# Altium PCB Lumos_v.0.2.PcbDoc
Units mm, origin at the board's own origin, x right, y up, seen from the top; angles counter-clockwise.
Board outline 50.08 x 69.72 mm, 2 copper layers (Top Layer, Bottom Layer); 32 components, 25 nets, 118 pads, 13 vias.
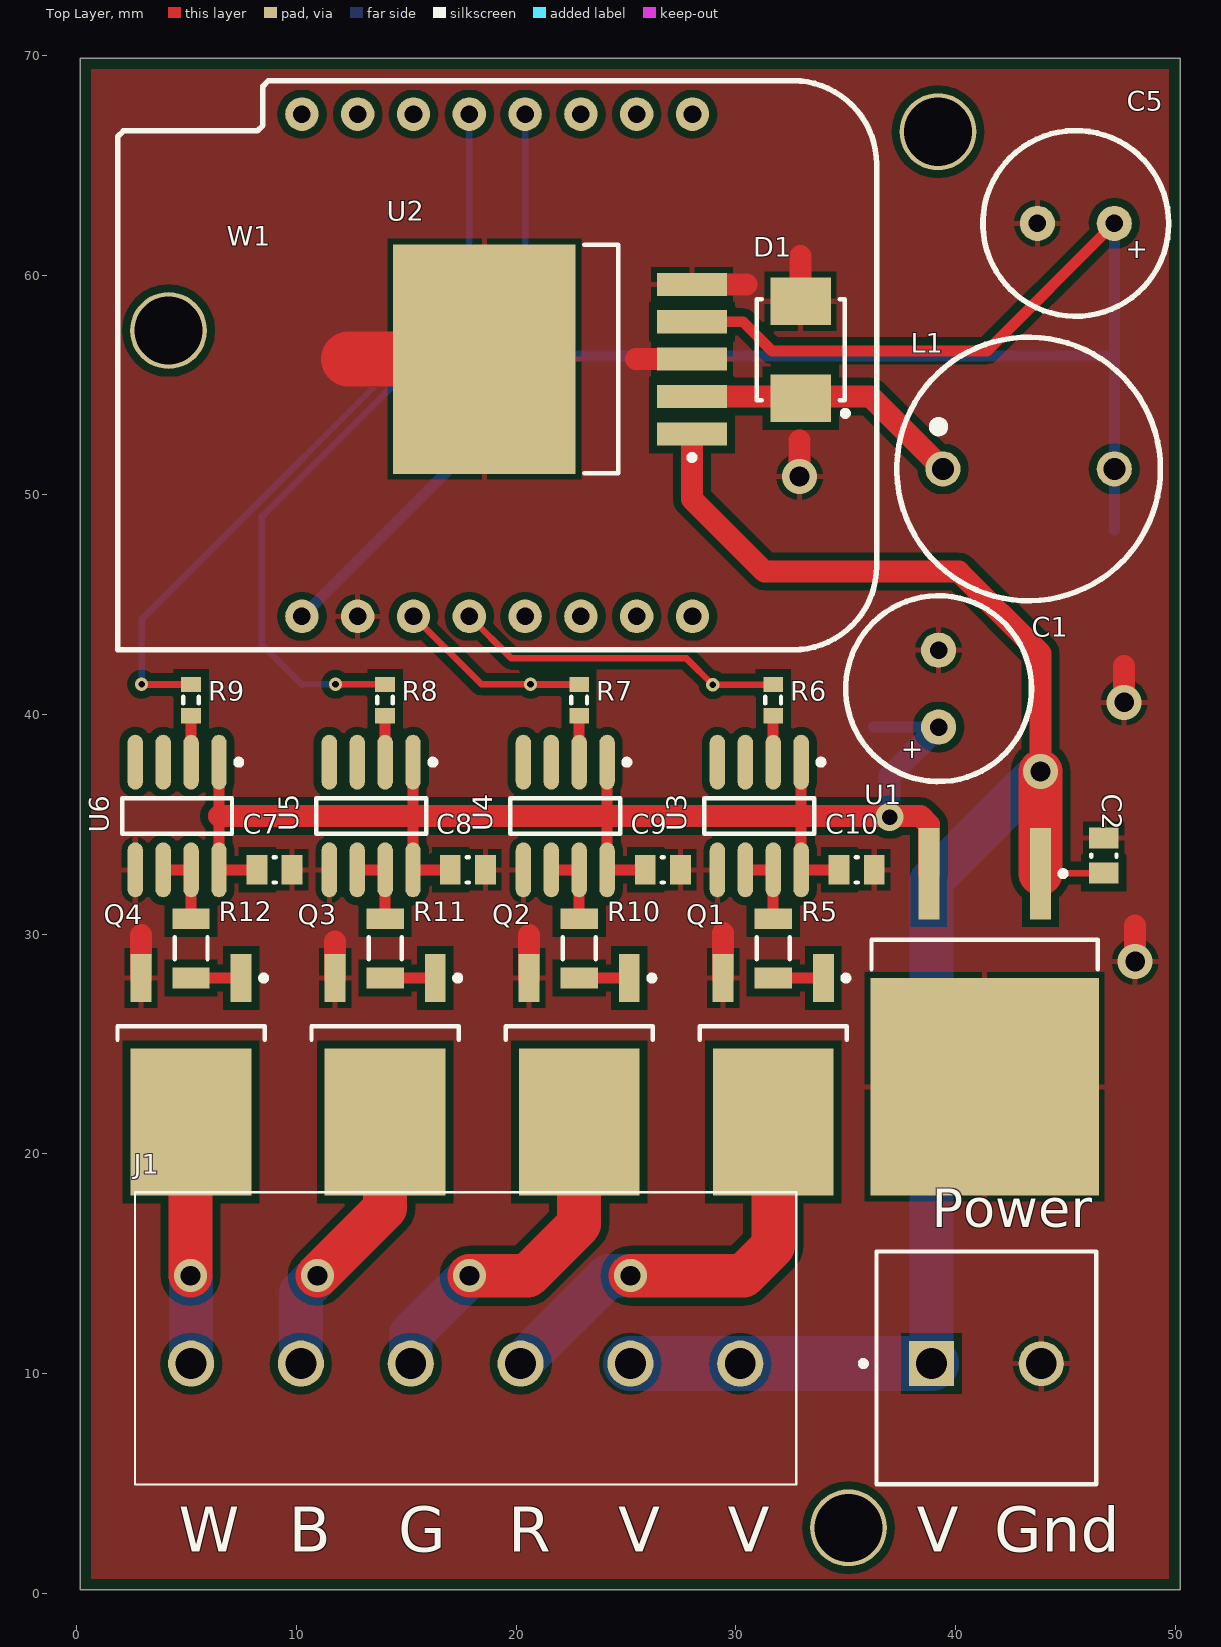
[diagram p0: Top Layer view]
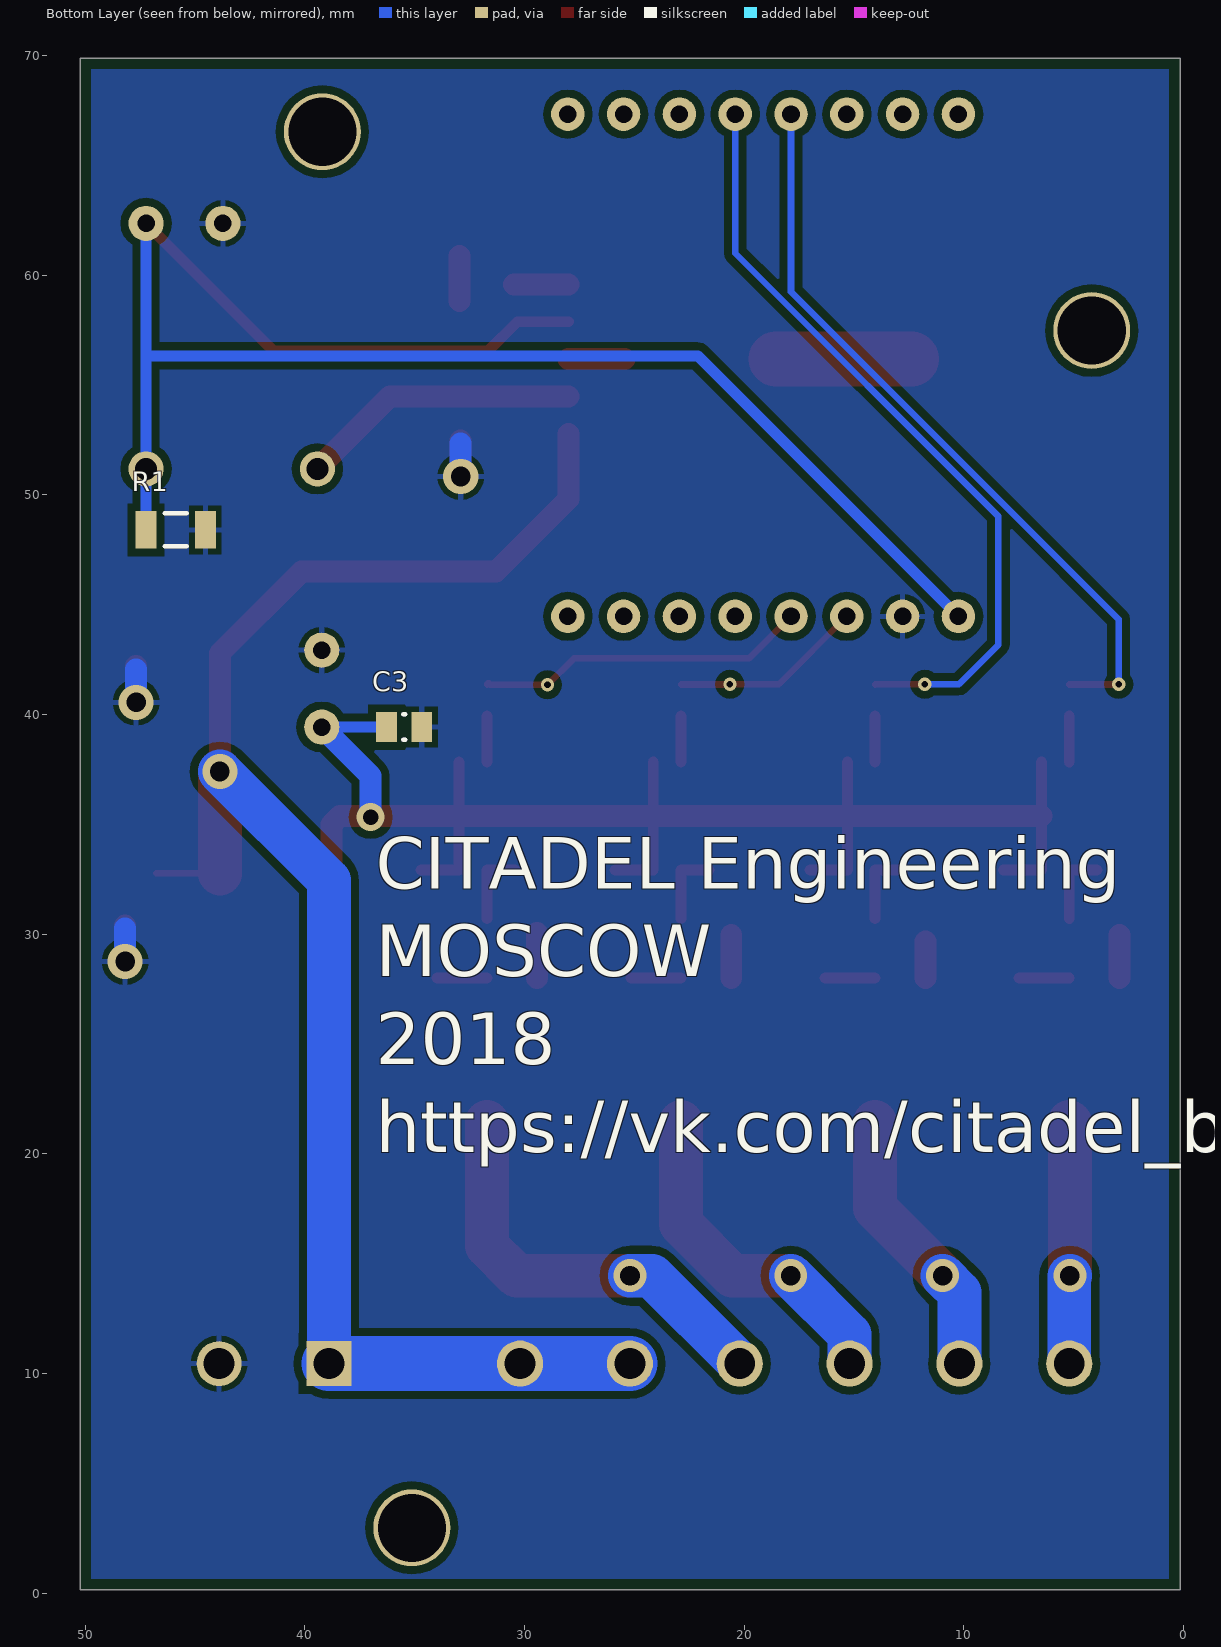
[diagram p1: Bottom Layer view, seen from below]

## Layer stack, top to bottom
Top Solder: solder mask 0.0102, Solder Resist, Dk 3.5
Top Layer: signal copper 0.0356
Dielectric 1: dielectric 0.32, FR-4, Dk 4.8
Bottom Layer: signal copper 0.0356
Bottom Solder: solder mask 0.0102, Solder Resist, Dk 3.5

## Board outline
0.15,0.15 0.15,69.875 50.225,69.875 50.225,0.15

## Design rules (kind name [scope] priority, off if disabled: settings)
BoardOutlineClearance [All] p1: gap=0.5 ignorepadtopadclearanceinfootprint=FALSE
Clearance [All] p1: gap=0.254 ignorepadtopadclearanceinfootprint=FALSE except(-0.3: Poly-Text; 0.25: Arc-SMDPad Track-SMDPad; 0.35: Arc-Poly Track-Poly SMDPad-Poly THPad-Poly Via-Poly Fill-Poly Poly-Poly)
ComponentClearance [All] p1: gap=0.254 collisioncheckmode=3 verticalgap=0 showdistances=FALSE
PolygonConnect [All] p1: connectstyle=Relief reliefconductorwidth=0.254 reliefentries=4 polygonreliefangle="90 Angle" airgapwidth=0.254
RoutingVias [All] p1: holewidth=0.6 width=1.2 viastyle="Through Hole" minholewidth=0.3 minwidth=0.6 maxholewidth=0.9 maxwidth=1.6
SolderMaskExpansion [All] p1: expansion=0.102
Width [All] p1: maxlimit=2.5 minlimit=0.3 preferedwidth=0.3
29 further rules are at their usual default settings.

## Components (designator, comment, footprint, x,y, rotation, side; value= is the part's Value field where it differs from the comment)
C1 "220uF" ECAP_Radial_8x11 39.225,41.175 r90 top
C2 "1uF" CAPC0805 46.75,33.575 r270 top
C3 "1uF" CAPC0805 35.475,39.425 r0 bottom
C5 "470uF" ECAP_Radial_8x11 45.475,62.35 r180 top
C7 "1uF" CAPC0805 9,32.925 r180 top
C8 "1uF" CAPC0805 17.8,32.925 r180 top
C9 "1uF" CAPC0805 26.675,32.925 r180 top
C10 "1uF" CAPC0805 35.5,32.925 r180 top
D1 "*" SMB 32.95,56.6 r270 top
J1 "KMRJ103-5.0/508 6WAYS" KONV-KMRJ103-5-508-6_V 17.7,10.45 r180 top
L1 "100uH" RLB1314-101KL 43.325,51.175 r0 top
Power "SCREW-5.0/5.08 2WAYS" SCREW-5.0-2WAYS_V 41.4,10.45 r0 top
Q1 "IRF8707" D-PAK 31.7,23.6 r270 top
Q2 "IRF8707" D-PAK 22.867,23.6 r270 top
Q3 "IRF8707" D-PAK 14.033,23.6 r270 top
Q4 "IRF8707" D-PAK 5.2,23.6 r270 top
R1 "100k" RES1206 45.875,48.4 r0 bottom
R5 "7R5" RES1206 31.7,29.35 r270 top
R6 "100" RES0603 31.7,40.65 r270 top
R7 "100" RES0603 22.867,40.65 r270 top
R8 "100" RES0603 14.033,40.65 r270 top
R9 "100" RES0603 5.2,40.65 r270 top
R10 "7R5" RES1206 22.867,29.35 r270 top
R11 "7R5" RES1206 14.033,29.35 r270 top
R12 "7R5" RES1206 5.2,29.35 r270 top
U1 "L7812" D2PAK-2 41.325,26.5 r270 top
U2 "5V" TO-263-5 22,56.175 r180 top
U3 "TC4420" SO-8 34.24,40.075 r270 top
U4 "TC4420" SO-8 25.407,40.075 r270 top
U5 "TC4420" SO-8 16.573,40.075 r270 top
U6 "TC4420" SO-8 7.74,40.075 r270 top
W1 "Wemos D1 mini" "Wemos D1 mini" 28.025,67.325 r270 top

## Footprints (in the part's own frame and the unit in brackets; to place one, negate y for a bottom-side part, rotate by r counter-clockwise, add the part's x,y. Pads: shape width x height; smd on the part's side, far side on the other; paste and mask are expansions set on the pad)
CAPC0805 [mm]
  rect 0.95x1.35 smd: 1(-0.8,0) 2(0.8,0)
  silkscreen extent -0.05,-0.58 0.05,0.58, body extent -1,-0.63 1,0.62, height 0.59
D2PAK-2 [mm] "D2-PAK, 3-Leads, Body 9.80x10.30mm, IPC Medium Density"
  rect 4.15x0.95 smd: 1(-6.25,2.54) 3(-6.25,-2.54)
  rect 9.9x10.4 smd: 4(3.45,0)
  silkscreen extent -6.37,-5.15 -1.9,5.15, body extent -7.63,-5.08 7.63,5.08, height 4.98
D-PAK [mm] "D-PAK, 4-Leads, Body 6.1x6.6mm, Pitch 2.28mm, Lead Span 9.8mm, IPC Low Density"
  rect 2.2x0.95 smd: 1(-4.4,2.28) 3(-4.4,-2.28)
  rect 6.7x5.5 smd: 4(2.15,0)
  silkscreen extent -4.52,-3.35 -1.6,3.43, body extent -4.64,-3.3 5.07,3.28, height 2.3
ECAP_Radial_8x11 [mm]
  round 1.6 hole 0.8: 1(-1.75,0) 2(1.75,0)
  silkscreen extent -4.23,-4.23 4.23,4.23, body extent -4.25,-4.25 4.25,4.25, height 13
KONV-KMRJ103-5-508-6_V [mm] "Socket, 6-way, 5.0mm Pitch Terminal Block"
  round 2.1 hole 1.4: 1(-12.5,0) 2(-7.5,0) 3(-2.5,0) 4(2.5,0) 5(7.5,0) 6(12.5,0)
  silkscreen extent -15.05,-7.8 15.05,5.5, body extent -15.83,-6.4 14.91,7, height 15.3
RES0603 [mm]
  rect 0.7x0.9 smd: 1(-0.711,0) 2(0.711,0)
  silkscreen extent -0.15,-0.36 0.15,0.36, body extent -0.82,-0.42 0.82,0.43, height 0.44
RES1206 [mm]
  rect 0.95x1.7 smd: 1(-1.35,0) 2(1.35,0)
  silkscreen extent -0.5,-0.75 0.5,0.75, body extent -1.6,-0.8 1.6,0.8, height 0.58
RLB1314-101KL [mm]
  round 1.6 hole 1: 1(-3.9,0) 2(3.9,0)
  silkscreen extent -6,-6 6,6, body extent -5.85,-5.85 5.85,5.85, height 13
SCREW-5.0-2WAYS_V [mm] "Socket, Screw Terminal Block, 2-Leads, Pitch 5mm, 90 Degree Angle, Through-Hole"
  rect 2.05x2.05 hole 1.4: 1(-2.5,0)
  round 2.05 hole 1.4: 2(2.5,0)
  silkscreen extent -5.72,-5.5 5,5.1, body extent -5,-5.5 5.02,5.1, height 18.2
SMB [mm] "Molded, 2-Leads, Body 4.6x3.95mm"
  rect 2.159x2.743 smd: 1(-2.21,0) 2(2.21,0)
  silkscreen extent -2.3,-2 3.02,2.16, body extent -2.65,-1.85 2.65,1.85, height 2.2
SO-8 [mm]
  oval 2.5x0.7 smd: 1(2.249,-1.27) 2(2.249,-2.54) 3(2.249,-3.81) 4(2.249,-5.08) 5(7.149,-5.08) 6(7.149,-3.81) 7(7.149,-2.54) 8(7.149,-1.27)
  silkscreen extent 2.12,-5.68 5.5,-0.24, body extent 1.75,-5.65 7.74,-0.75, height 1.6
TO-263-5 [mm] "D2-PAK, 6-Leads, Body 8.6x10.2mm, Pitch 1.7mm, Lead Span 14.1mm, IPC Medium Density"
  rect 3.2x1.05 smd: 1(-6,3.4) 2(-6,1.7) 3(-6,0) 4(-6,-1.7) 5(-6,-3.4)
  rect 8.3x10.45 smd: 6(3.45,0)
  silkscreen extent -6.13,-5.2 -1.1,5.2, body extent -7.61,-5.15 7.61,5.15, height 4.5
"Wemos D1 mini" [mil]
  round 60 hole 31.5: +3.3V(0,-700) +5V(900,-700) A0(0,-100) D0(0,-200) D1(900,-200) D2(900,-300) D3(900,-400) D4(900,-500) D5(0,-300) D6(0,-400) D7(0,-500) D8(0,-600) Gnd(900,-600) RST(0,0) RX(900,-100) TX(900,0)
  silkscreen extent -60,-1030 960,330, body extent -56,-1024 956,324, height 511

## Part data
C1: library part ECAP_Radial_8x11, Voltage=25V, Capacitance=220uF
C2 C3 C7 C8 C9 C10: library part CAP_SMD_ceramic, Voltage=50V
C5: library part ECAP_Radial_8x11, Capacitance=470uF
D1: library part Diode
J1: library part CMP-0407-00002-1, "Socket, Screw Terminal Block, 6 Way, 5.0mm Pitch, 45 Degree Angle, Through-hole", Manufacturer="Konvee Electronic", ComponentLink1Description="Manufacturer URL", ComponentLink1URL=http://www.konvee.com/, Mounting Technology="Through Hole", PackageDescription="Socket, 6-way, 5.0mm Pitch Terminal Block", PackageReference=KMRJ103-5-508-6, PartNumber="KMRJ103-5.0/508 6WAYS"
L1: library part Inductor
Power: library part CMP-0617-00009-1, "Socket, Screw Terminal Block, 2 Way, 5.0 mm Pitch, 90 Degree Angle, Through-Hole", Contact Resistance="20 mOhm", Insulation Resistance="5000 MOhm / 1000 V", Manufacturer="No Vendor", Rated Current="25 A", Rated Voltage="300 V", Temperature Range="-40 to 105 degC", ComponentLink1Description=Datasheet, ComponentLink1URL="5mm screw terminal in SVN", Mounting Technology="Through Hole", PackageDescription="Socket, Screw Terminal Block, 2 Way, Pitch 5 mm, 90 Degree Angle, Through-Hole", PartNumber="SCREW-5.0/5.08 2WAYS", Poles=2
Q1 Q2 Q3 Q4: library part MOSFET-N, Model=IRF8707
R1 R5 R6 R7 R8 R9 R10 R11 R12: library part RES_SMD
U1: library part L78xx, Model=L7812
U2: library part LM2576, Voltage=5V

## Free pads (board coordinates)
  round 3.5 hole 3.1: MH(4.175,57.475) MH(35.125,2.975) MH(39.2,66.525)

## Via types
v1: diameter 1.6, hole 0.9, Top Layer to Bottom Layer, 4 vias
v2: diameter 1.5, hole 0.9, Top Layer to Bottom Layer, 4 vias
v3: diameter 0.6, hole 0.3, Top Layer to Bottom Layer, 4 vias
v4: diameter 1.27, hole 0.711, Top Layer to Bottom Layer, 1 vias

## Nets (pads, with @x,y where several pads share a name; then routed paths per layer and width w, separated by ;. In a path a pad name is that pad's centre, name@x,y a point inside that pad or via, vN(x,y) a via of type N, cw(c..) or ccw(c..) an arc to the next point about the centre after c; other vN are vias at no path point)
+5: C5.1 L1.2 R1.2 U2.4 W1.+5V | length 78
  Top Layer w0.5: U2.4 30.325,57.875 31.65,56.55 41.425,56.55 C5.1
  Bottom Layer w0.5: W1.+5V 22.105,56.325 47.225,56.325 ; R1.2 L1.2 47.225,56.325 ; C5.1 47.225,56.325
+12: C1.1 C3.2 C7.2 C8.2 C9.2 C10.2 U1.3 U3.1 U3.8 U4.1 U4.8 U5.1 U5.8 U6.1 U6.8 | length 69.2
  Top Layer w0.5: U6.1 6.47,35.375 U6.8 C7.2@8.2,32.926 ; U5.1 15.303,35.375 U5.8 C8.2 ; U4.1 24.137,35.375 U4.8 C9.2@25.875,32.926 ; U3.1 32.97,35.375 U3.8 32.971,32.925 C10.2
  Top Layer w1: 6.47,35.375 15.303,35.375 24.137,35.375 32.97,35.375 38.4,35.375 38.785,34.99 U1.3
  Bottom Layer w0.5: C3.2 C1.1
  Bottom Layer w1: v4(37,35.325) 37,37.2 C1.1
+24: C2.2 J1.1 J1.2 Power.1 U1.1 U2.1 | length 77.4
  Top Layer w0.3: U1.1 43.89,32.775 C2.2
  Top Layer w1: U2.1 28,49.8 31.3,46.5 40.15,46.5 43.865,42.785 v1(43.865,37.4)
  Top Layer w2: U1.1 v1(43.865,37.4)
  Bottom Layer w2: Power.1 38.9,17.45 38.9,32.435 v1(43.865,37.4)
  Bottom Layer w2.5: J1.2 J1.1 Power.1
GND: C1.2 C2.1 C3.1 C5.2 C7.1 C8.1 C9.1 C10.1 D1.1 Power.2 Q1.3 Q2.3 Q3.3 Q4.3 R1.1 U1.4 U2.3 U2.5 U2.6 U3.5 U4.5 U5.5 U6.5 W1.Gnd | length 30.4
  Top Layer w1: Q4.3 2.92,29.97 ; Q3.3 11.753,29.672 ; Q2.3 20.587,29.963 ; 25.45,56.175 U2.3 ; U2.5 30.475,59.575 ; Q1.3 29.42,30.055 ; v1(32.9,50.825) 32.9,52.475 ; D1.1 32.95,60.875 ; v1(47.675,40.55) 47.675,42.2 ; v1(48.175,28.75) 48.175,30.4
  Top Layer w2.5: 12.375,56.175 U2.6
  Bottom Layer w1: v1(32.9,50.825) 32.9,52.325 ; v1(47.675,40.55) 47.675,42.05 ; v1(48.175,28.75) 48.175,30.25
NetD1_2: D1.2 L1.1 U2.2 | length 12.8
  Top Layer w1: U2.2 36.125,54.475 L1.1
NetJ1_3: J1.3 Q1.4 | length 19.4
  Top Layer w2: v2(25.2,14.45) 30.35,14.45 31.7,15.8 Q1.4
  Bottom Layer w2: J1.3 24.2,14.45 v2(25.2,14.45)
NetJ1_4: J1.4 Q2.4 | length 15.7
  Top Layer w2: v2(17.878,14.45) 20.525,14.45 22.867,16.792 Q2.4
  Bottom Layer w2: J1.4 15.2,11.772 v2(17.878,14.45)
NetJ1_5: J1.5 Q3.4 | length 12.6
  Top Layer w2: v2(10.961,14.45) 14.033,17.522 Q3.4
  Bottom Layer w2: J1.5 10.2,13.689 v2(10.961,14.45)
NetJ1_6: J1.6 Q4.4 | length 11
  Top Layer w2: v2(5.175,14.45) 5.175,21.425 Q4.4
  Bottom Layer w2: v2(5.175,14.45) 5.2,14.425 J1.6
NetQ1_1: Q1.1 R5.2 | length 2.3
  Top Layer w0.5: R5.2 Q1.1
NetQ2_1: Q2.1 R10.2 | length 2.3
  Top Layer w0.5: R10.2 Q2.1
NetQ3_1: Q3.1 R11.2 | length 2.3
  Top Layer w0.5: R11.2 Q3.1
NetQ4_1: Q4.1 R12.2 | length 2.3
  Top Layer w0.5: R12.2 Q4.1
NetR5_1: R5.1 U3.6 U3.7 | length 3.5
  Top Layer w0.5: U3.6 U3.7 R5.1
NetR6_1: R6.1 W1.D3 | length 15.2
  Top Layer w0.3: W1.D3 19.78,42.55 27.75,42.55 v3(28.95,41.35) 31.561,41.35 31.636,41.425 R6.1
NetR6_2: R6.2 U3.2 | length 2.1
  Top Layer w0.5: U3.2 R6.2
NetR7_1: R7.1 W1.D4 | length 8.8
  Top Layer w0.3: W1.D4 18.415,41.375 v3(20.65,41.375) 20.664,41.361 R7.1
NetR7_2: R7.2 U4.2 | length 2.1
  Top Layer w0.5: U4.2 R7.2
NetR8_1: R8.1 W1.D5 | length 35.5
  Top Layer w0.3: v3(11.775,41.375) 14.02,41.375 R8.1
  Bottom Layer w0.3: v3(11.775,41.375) 10.225,41.375 8.425,43.175 8.425,49.017 20.405,60.997 W1.D5
NetR8_2: R8.2 U5.2 | length 2.1
  Top Layer w0.5: U5.2 R8.2
NetR9_1: R9.1 W1.D6 | length 34.4
  Top Layer w0.3: v3(2.95,41.375) 2.964,41.361 R9.1
  Bottom Layer w0.3: v3(2.95,41.375) 2.95,44.325 17.865,59.24 W1.D6
NetR9_2: R9.2 U6.2 | length 2.1
  Top Layer w0.5: U6.2 R9.2
NetR10_1: R10.1 U4.6 U4.7 | length 3.5
  Top Layer w0.5: U4.6 U4.7 R10.1
NetR11_1: R11.1 U5.6 U5.7 | length 3.5
  Top Layer w0.5: U5.6 U5.7 R11.1
NetR12_1: R12.1 U6.6 U6.7 | length 3.5
  Top Layer w0.5: U6.6 U6.7 R12.1
pads on no net: U3.3 U3.4 U4.3 U4.4 U5.3 U5.4 U6.3 U6.4 W1.+3.3V W1.A0 W1.D0 W1.D1 W1.D2 W1.D7 W1.D8 W1.RST W1.RX W1.TX

## Polygon pours and split planes (outlines as drawn)
GND on Bottom Layer "Bottom - Gnd" (solid, pour order 0): -0.525,0.15 -0.525,69.875 50.225,69.875 50.225,0.15
GND on Top Layer "Top - Gnd" (solid, pour order 1): 0.15,0.15 0.15,69.875 51,69.875 51,0.15

## Silkscreen, mask and mechanical layers (free items; w line width, h text height)
Top Overlay:
  circle w0.5: c39.225,53.1 r0.19
  text "W" at 4.636,1.2 h3.5
  text "B" at 9.636,1.2 h3.5
  text "G" at 14.636,1.2 h3.5
  text "R" at 19.636,1.2 h3.5
  text "V" at 24.636,1.2 h3.5
  text "V" at 29.636,1.2 h3.5
  text "V" at 38.229,1.2 h3.5
  text "Gnd" at 41.765,1.2 h3.5
Bottom Overlay:
  text "CITADEL Engineering / MOSCOW / 2018 / https://vk.com/citadel_bos" at 36.775,19.3 h4
Top Solder:
  lines w2: 5.175,14.45 5.175,18.4 ; 10.961,14.45 10.961,14.461 14.05,17.55 14.05,18.675 ; 17.878,14.45 20.525,14.45 22.85,16.775 22.85,19.875 ; 25.2,14.45 30.35,14.45 31.7,15.8 31.7,19.725
Bottom Solder:
  lines w1: 38.9,10.45 38.9,32.435 43.865,37.4
  lines w2: 5.175,10.475 5.175,14.45 ; 10.2,10.45 10.2,13.689 10.961,14.45 ; 15.2,10.45 15.2,11.772 17.878,14.45 ; 20.2,10.45 24.2,14.45 ; 24.2,14.45 25.2,14.45 24.2,14.45
  lines w2.54: 25.2,10.45 38.9,10.45
Board:
  the board outline again, w0.3

## Dimensions
50.225,0.15 to 0.15,0.15 on Mechanical 16
50.225,69.875 to 50.225,0.15 on Mechanical 16

## Text inside footprints (layer, text, board x,y; h text height)
C1: Top Overlay "+" at 38.717,37.873 h1.52 r90
C5: Top Overlay "+" at 48.777,61.842 h1.52 r180